# Altium PCB Full_Bridge.PcbDoc
Units mil, origin at the board's own origin, x right, y up, seen from the top; angles counter-clockwise.
Board outline 3300 x 5025 mil, 2 copper layers (Top Layer, Bottom Layer); 35 components, 29 nets, 186 pads, 320 vias.
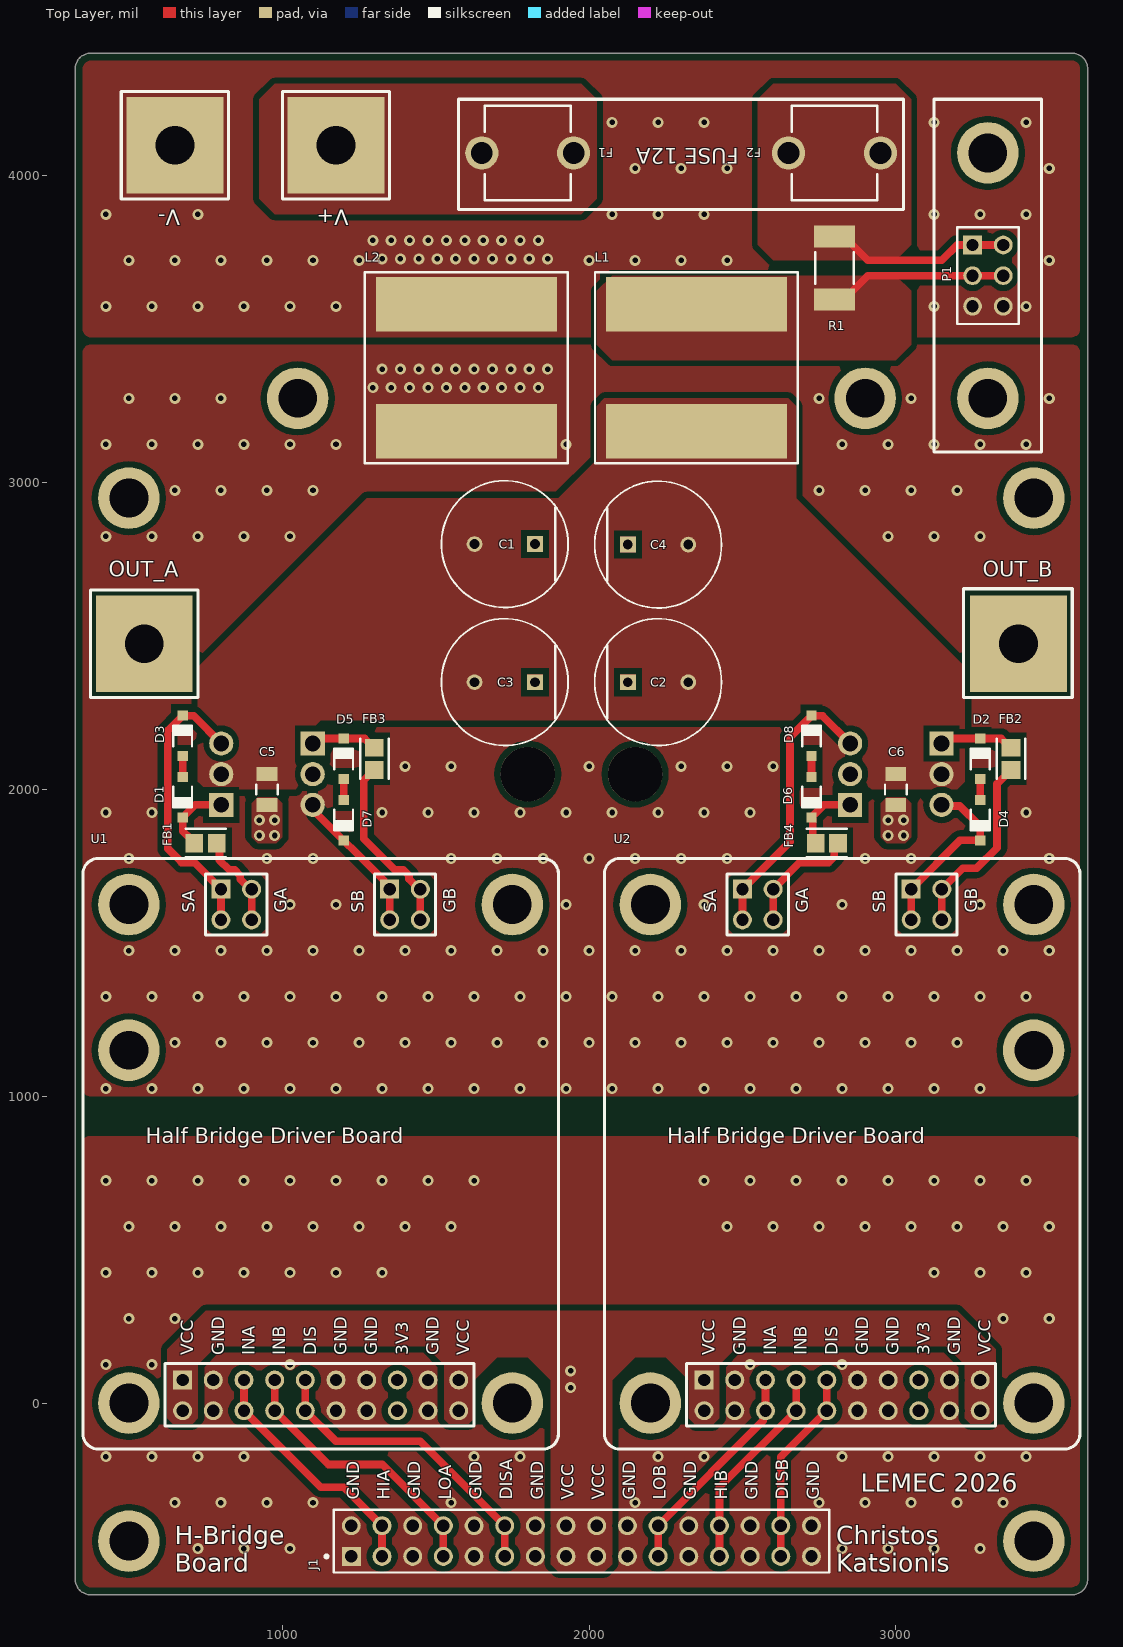
[diagram p0: Top Layer view]
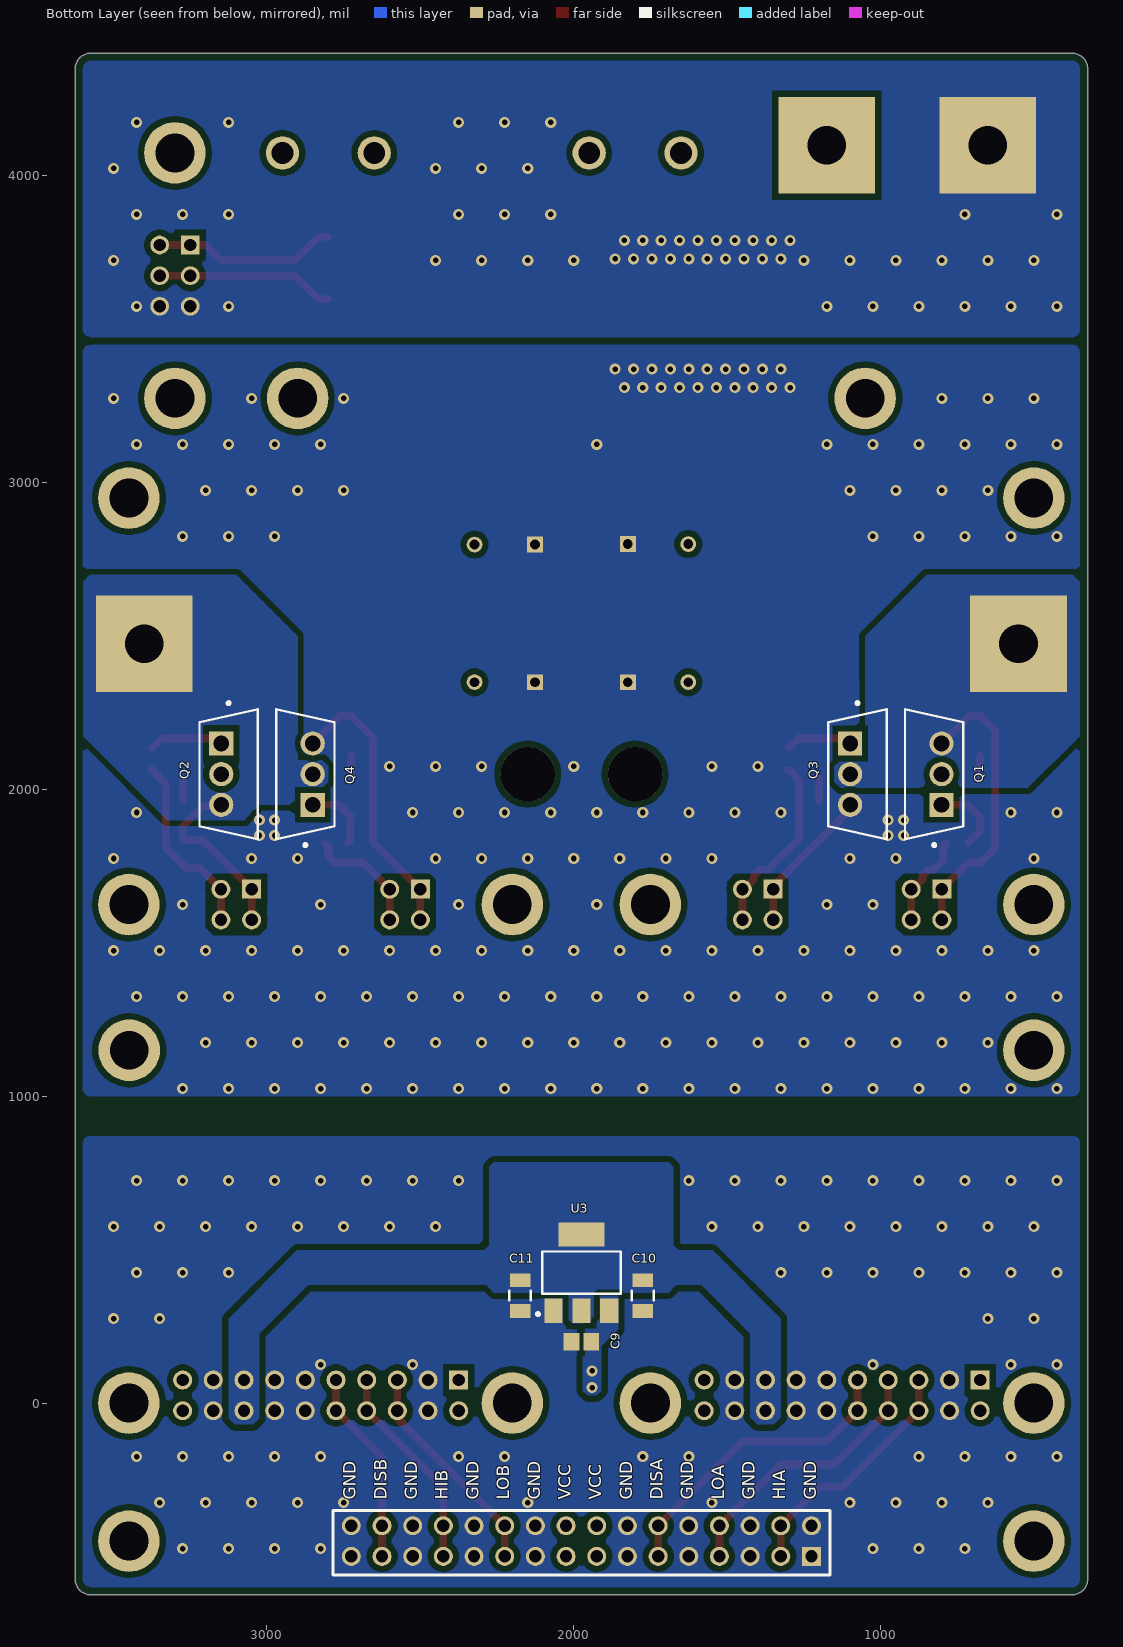
[diagram p1: Bottom Layer view, seen from below]
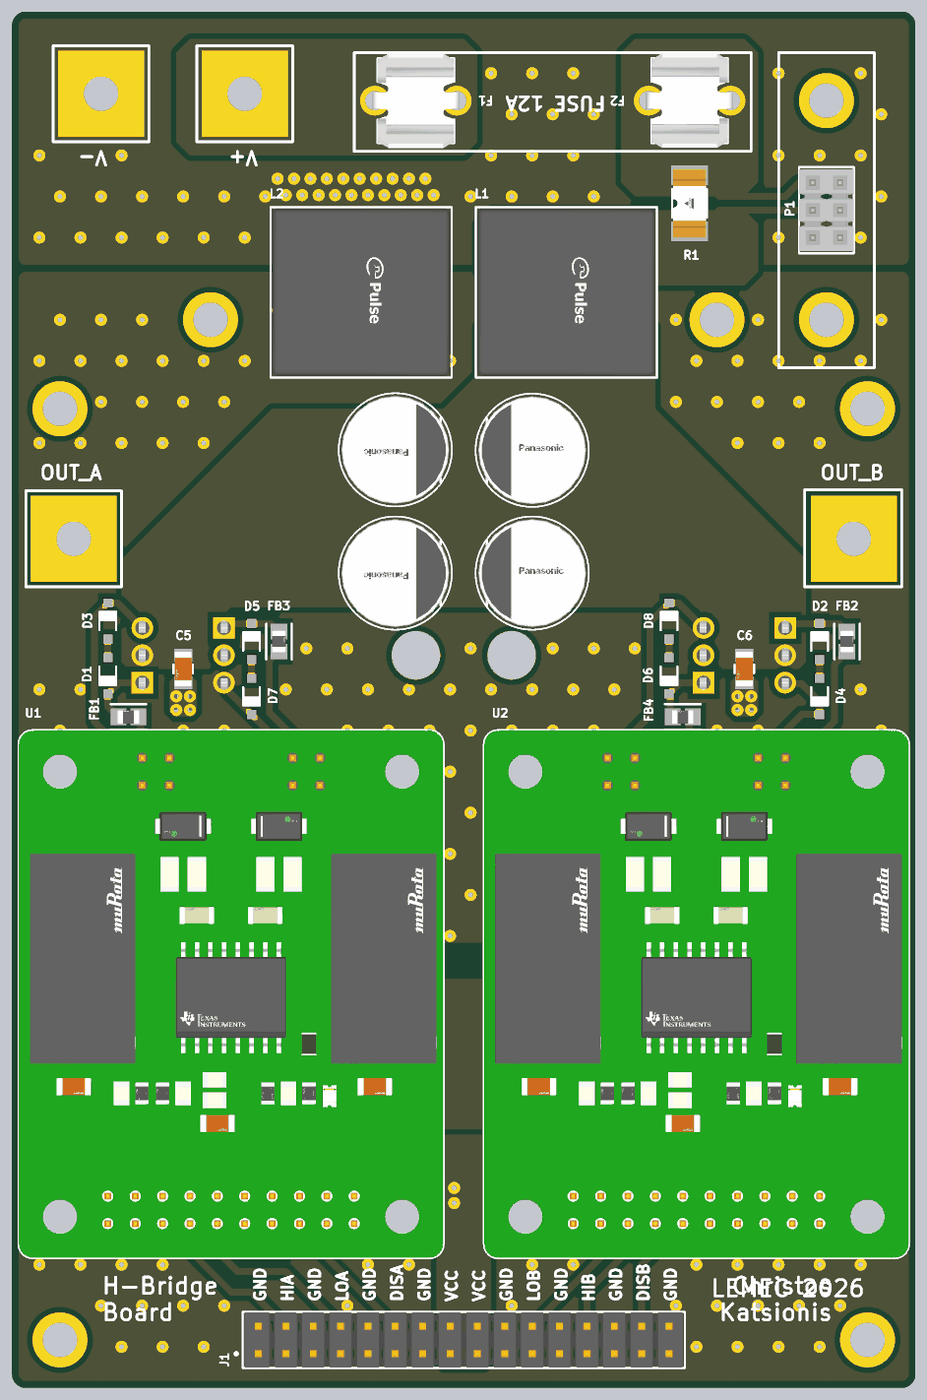
[diagram p2: 3D render of the assembled board from above, using the file's embedded part models]
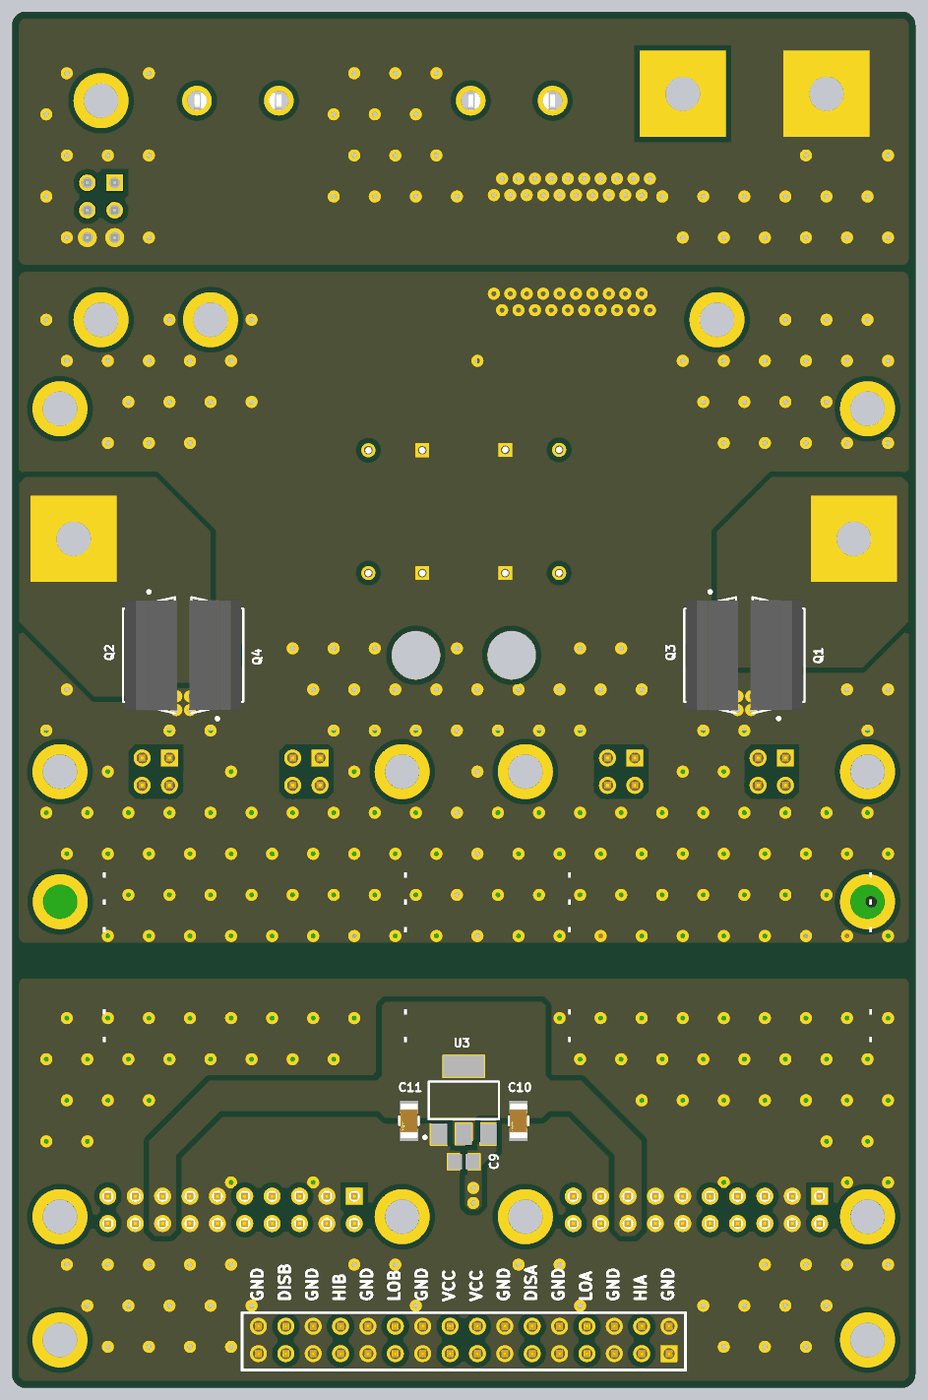
[diagram p3: 3D render of the assembled board from below, using the file's embedded part models]

## Layer stack, top to bottom
Top Solder: solder mask 0.4, Solder Resist, Dk 3.5
Top Layer: signal copper 1.4
Dielectric 1: dielectric 12.6, FR-4, Dk 4.8
Bottom Layer: signal copper 1.4
Bottom Solder: solder mask 0.4, Solder Resist, Dk 3.5

## Board outline
325,-575 325,4350 cw(c375,4350) 375,4400 3575,4400 cw(c3575,4350) 3625,4350 3625,-575 cw(c3575,-575) 3575,-625 375,-625 cw(c375,-575)

## Design rules (kind name [scope] priority, off if disabled: settings)
Clearance [All] p1: gap=19.68 ignorepadtopadclearanceinfootprint=TRUE
Height [All] p1: minheight=0 maxheight=1500 prefheight=500
HoleSize [All] p1: absolutevalues=TRUE maxlimit=200 minlimit=1 maxpercent=80.000 minpercent=20.000
MinimumSolderMaskSliver [All] p1: minsoldermaskwidth=5
PolygonConnect PolygonConnectPowerRails [InNetClass('Power Rails')] p1: connectstyle=Direct reliefconductorwidth=10 reliefentries=4 polygonreliefangle="90 Angle" airgapwidth=10
PolygonConnect PolygonConnectPower [InNetClass('Main Power')] p2: connectstyle=Direct reliefconductorwidth=10 reliefentries=4 polygonreliefangle="90 Angle" airgapwidth=10
PolygonConnect [All] p3: connectstyle=Direct reliefconductorwidth=10 reliefentries=4 polygonreliefangle="90 Angle" airgapwidth=7
RoutingVias [All] p1: holewidth=12 width=24 viastyle="Through Hole" minholewidth=12 minwidth=24 maxholewidth=18 maxwidth=36
SilkToSolderMaskClearance [IsPad] p1: minsilkscreentomaskgap=6 clearancetoexposedcopper=TRUE
SolderMaskExpansion [All] p1: expansion=4 istentingtop=FALSE
SupplyNets "Schematic Supply Nets_1" [InNet('PWR_GND')] p1: voltage=0.000
SupplyNets "Schematic Supply Nets_16" [InNet('+V_BAT')] p2: voltage=0.000
SupplyNets "Schematic Supply Nets_9" [InNet('+3V3')] p3: voltage=0.000
SupplyNets "Schematic Supply Nets_7" [InNet('VCC')] p4: voltage=0.000
SupplyNets "Schematic Supply Nets_5" [InNet('GND')] p5: voltage=0.000
Width PowerRailsWidth [InNetClass('Power Rails')] p1: maxlimit=50 minlimit=20 preferedwidth=30 minimp=50.000000 maximp=50.000000 favimp=50.000000
Width DriverSignalsWidth [InNetClass('Driver Signals')] p2: maxlimit=20 minlimit=15 preferedwidth=20 minimp=50.000000 maximp=50.000000 favimp=50.000000
Width DriverPowerWidth [InNetClass('Driver Power')] p3: maxlimit=50 minlimit=20 preferedwidth=30 minimp=50.000000 maximp=50.000000 favimp=50.000000
Width [All] p4: maxlimit=25 minlimit=15 preferedwidth=20 minimp=50.000000 maximp=50.000000 favimp=50.000000
26 further rules are at their usual default settings.

## Classes and differential pairs
component class Full_Bridge: D1 D2 D3 D4 D5 D6 D7 D8 FB1 FB2 FB3 FB4 Q1 Q2 Q3 Q4 U1 U2
net class "Power Rails": +3V3 GND
component class Aux_Connectors: C1 C2 C3 C4 C5 C6 C9 C10 C11 F1 F2 J1 L1 L2 P1 R1 U3
net class "Main Power": +V_BAT BAT_EXT+ BAT_EXT- HB_OUT_A HB_OUT_B PWR_GND V_SENSE+ V_SENSE-

## Components (designator, comment, footprint, x,y, rotation, side; value= is the part's Value field where it differs from the comment)
C1 "100u" FP-EEHA-G-MFG 1725,2800 r180 top
C2 "100u" FP-EEHA-G-MFG 2225,2350 r0 top
C3 "100u" FP-EEHA-G-MFG 1725,2350 r180 top
C4 "100u" FP-EEHA-G-MFG 2225,2798.43 r0 top
C5 "4.7u" FP-GRM31C-0_2-e0_3_0_8-IPC_C 950,2000 r270 top
C6 "4.7u" FP-GRM31C-0_2-e0_3_0_8-IPC_C 3000,2000 r270 top
C9 "0.1u" CAPC2013X145X48NL20T23 1975,200 r180 bottom
C10 "4.7u" FP-GRM31C-0_2-e0_3_0_8-IPC_C 1775,350 r270 bottom
C11 "4.7u" FP-GRM31C-0_2-e0_3_0_8-IPC_C 2175,350 r270 bottom
D1 "15" VISH-SOD-123-2_V 675,1975 r270 top
D2 "15" VISH-SOD-123-2_V 3275,2100 r90 top
D3 "5" VISH-SOD-123-2_V 675,2175 r90 top
D4 "5" VISH-SOD-123-2_V 3275,1900 r270 top
D5 "15" VISH-SOD-123-2_V 1200,2100 r90 top
D6 "15" VISH-SOD-123-2_V 2725,1975 r270 top
D7 "5" VISH-SOD-123-2_V 1200,1900 r270 top
D8 "5" VISH-SOD-123-2_V 2725,2175 r90 top
F1 "12A" FP-8040_0001-MFG 1800,4075 r180 top
F2 "12A" FP-8040_0001-MFG 2800,4075 r0 top
FB1 "BLM21SN300SH1D" FP-BLM21-0_2-t0_85-e0_5-d-IPC_A 750,1825 r180 top
FB2 "BLM21SN300SH1D" FP-BLM21-0_2-t0_85-e0_5-d-IPC_A 3375,2100 r90 top
FB3 "BLM21SN300SH1D" FP-BLM21-0_2-t0_85-e0_5-d-IPC_A 1300,2100 r90 top
FB4 "BLM21SN300SH1D" FP-BLM21-0_2-t0_85-e0_5-d-IPC_A 2775,1825 r180 top
J1 "MB_CONNECTOR" FP-MTSW-116-22-G-D-315-MFG 1975,-450 r0 top
L1 "22u" FP-PA2247_223NLT-MFG 2350,3375 r270 top
L2 "22u" FP-PA2247_223NLT-MFG 1600,3375 r270 top
P1 "FG_CONNECTOR" SMTC-MTSW-103-07-X-D-244 3250,3775 r270 top
Q1 "IRFB7446PBF" FP-PG-TO220-3-MFG 825,2050 r0 bottom
Q2 "IRFB7446PBF" FP-PG-TO220-3-MFG 3125,2050 r180 bottom
Q3 "IRFB7446PBF" FP-PG-TO220-3-MFG 1075,2050 r180 bottom
Q4 "IRFB7446PBF" FP-PG-TO220-3-MFG 2875,2050 r0 bottom
R1 "1m" FP-WSLF2512-0_43-MFG 2800,3700 r270 top
U1 "HB_Driver_Board" HB_Driver 345,-155 r0 top
U2 "HB_Driver_Board" HB_Driver 2045,-155 r0 top
U3 "NCP1117ST33T3G" ONSC-SOT-223-4-318H-01_A_V 1975,425 r90 bottom

## Footprints (in the part's own frame and the unit in brackets; to place one, negate y for a bottom-side part, rotate by r counter-clockwise, add the part's x,y. Pads: shape width x height; smd on the part's side, far side on the other; paste and mask are expansions set on the pad)
CAPC2013X145X48NL20T23 [mm] "Chip Capacitor, 2-Leads, Body 2.00x1.25mm, IPC Medium Density"
  rect 1.3x1.45 smd: 1(-0.825,0) 2(0.825,0)
  body extent -1.1,-0.72 1.1,0.72, height 1.45
FP-8040_0001-MFG [mm]
  round 2.75 hole 1.8 paste-2539.97 mask+0: 1(-3.8,0) 1(3.8,0)
  silkscreen extent -3.55,-3.93 3.55,3.92, body extent -5.28,-4.03 5.28,4.02, height 0.25
FP-BLM21-0_2-t0_85-e0_5-d-IPC_A [mil]
  rect 57.28x61.27 smd paste+0 mask+0: 1(-36.44,0) 2(36.44,0)
  silkscreen extent -65,-46 65,46, body extent -39,-25 39,25, height 41
FP-EEHA-G-MFG [mm]
  rect 1.3x1.3 hole 0.8 paste-2539.97 mask+0: 1(-2.5,0)
  round 1.3 hole 0.8 paste-2539.97 mask+0: 2(2.5,0)
  silkscreen extent -5.25,-5.25 5.25,5.25, body extent -5.35,-5.35 5.35,5.35, height 0.25
FP-GRM31C-0_2-e0_3_0_8-IPC_C [mil]
  rect 45.46x67.17 smd paste+0 mask+0: 1(-50.23,0) 2(50.23,0)
  silkscreen extent -16,-35 16,35, body extent -63,-31 63,31, height 71
FP-MTSW-116-22-G-D-315-MFG [mm]
  rect 1.57x1.57 hole 1.02 paste-2539.97 mask+0: 1(-19.05,-1.27)
  round 1.57 hole 1.02 paste-2539.97 mask+0: 2(-19.05,1.27) 3(-16.51,-1.27) 4(-16.51,1.27) 5(-13.97,-1.27) 6(-13.97,1.27) 7(-11.43,-1.27) 8(-11.43,1.27) 9(-8.89,-1.27) 10(-8.89,1.27) 11(-6.35,-1.27) 12(-6.35,1.27) 13(-3.81,-1.27) 14(-3.81,1.27) 15(-1.27,-1.27) 16(-1.27,1.27) 17(1.27,-1.27) 18(1.27,1.27) 19(3.81,-1.27) 20(3.81,1.27) 21(6.35,-1.27) 22(6.35,1.27) 23(8.89,-1.27) 24(8.89,1.27) 25(11.43,-1.27) 26(11.43,1.27) 27(13.97,-1.27) 28(13.97,1.27) 29(16.51,-1.27) 30(16.51,1.27) 31(19.05,-1.27) 32(19.05,1.27)
  silkscreen extent -21.23,-2.61 20.51,2.61, body extent -20.61,-2.71 20.61,2.71, height 0.25
FP-PA2247_223NLT-MFG [mm]
  rect 4.5x15 smd paste+0 mask+0: 1(-5.25,0) 2(5.25,0)
  silkscreen extent -7.9,-8.4 7.9,8.4, body extent -8,-8.5 8,8.5, height 0.25
FP-PG-TO220-3-MFG [mm]
  rect 2x2 hole 1.3 paste-2539.97 mask+0: 1(-0.61,2.54)
  round 2 hole 1.3 paste-2539.97 mask+0: 2(-0.61,0) 3(-0.61,-2.54)
  silkscreen extent -2.41,-5.38 2.41,6, body extent -2.22,-5.11 2.61,5.08, height 19.49
FP-WSLF2512-0_43-MFG [mm]
  rect 1.8x3.4 smd paste+0 mask+0: 1(-2.6,0) 2(2.6,0)
  silkscreen extent -1.33,-1.61 1.33,1.61, body extent -3.6,-1.8 3.6,1.8, height 0.25
HB_Driver [mm]
  round 1.57 hole 1.02 paste-2539.97 mask+0: 1(8.382,3.302) 1(31.242,3.302) 1(31.242,5.842) 2(26.162,3.302) 2(26.162,5.842) 3(13.462,3.302) 3(13.462,5.842) 4(16.002,3.302) 4(16.002,5.842) 5(18.542,3.302) 5(18.542,5.842) 6(10.922,3.302) 6(10.922,5.842) 6(21.082,3.302) 6(21.082,5.842) 6(23.622,3.302) 6(23.622,5.842) 6(28.702,3.302) 6(28.702,5.842) 7(14.097,43.942) 7(14.097,46.482) 8(11.557,43.942) 9(28.067,43.942) 9(28.067,46.482) 10(25.527,43.942)
  rect 1.57x1.57 hole 1.02 paste-2539.97 mask+0: 1(8.382,5.842) 8(11.557,46.482) 10(25.527,46.482)
  round 5.099 hole 3.2 paste-2539.97 mask+0: 11(3.937,3.937) 11(3.937,45.212) 11(35.687,3.937) 11(35.687,45.212)
  silkscreen extent 0.13,0.13 39.5,49.02, body extent 0.13,0.13 39.5,49.02, height 16.31
ONSC-SOT-223-4-318H-01_A_V [mm] "SOT223, 4-Leads, Body 6.5x3.5mm, Pitch 2.3mm"
  rect 2x1.5 smd: 1(-3.15,2.3) 2(-3.15,0) 3(-3.15,-2.3)
  rect 2x3.8 smd: 4(3.15,0)
  silkscreen extent -3.55,-3.25 1.75,3.73, body extent -1.75,-3.25 1.75,3.25, height 1.8
SMTC-MTSW-103-07-X-D-244 [mm] "Assembly .025\" [.64] SQ Post Terminal Strip, 2x3 Pins, Vertical, 2.54mm Pitch, Male"
  rect 1.55x1.55 hole 1.02: 1(0,0)
  round 1.55 hole 1.02: 2(0,2.54) 3(2.54,0) 4(2.54,2.54) 5(5.08,0) 6(5.08,2.54)
  silkscreen extent -1.46,-1.27 6.54,3.81, body extent -1.27,-1.27 6.35,3.81, height 8.74
VISH-SOD-123-2_V [mm] "SMD, 2-Leads, Body 2.7x1.55mm, Height 1.35mm"
  rect 0.85x0.85 smd: 1(-1.675,0) 2(1.675,0)
  silkscreen extent -0.85,-0.77 0.85,0.78, body extent -1.35,-0.77 1.35,0.77, height 1.35

## Part data
C1 C2 C3 C4: library part CMP-05428-000952-1, "Conductive Polymer Hybrid Aluminum Electrolytic Capacitors 100uF ±20% 50V RADIAL TH 10x9.5mm"
C5 C6 C10 C11: library part CMP-06035-057352-1, "Chip Multilayer Ceramic Capacitors for General Purpose, 1206, 4.7uF, X7R, 15%, 20%, 50V", Capacitance=4.7uF, Case Code (Imperial)=1206, Case Code (Metric)=3216, Dielectric=X7R, Max Operating Temperature=125°C, Min Operating Temperature=-55°C, Package Quantity=2000, Tolerance=20%, Voltage Rating=50V, Case/Package=1206, Depth=1.6mm, Height=1.6mm, Lead Free="Lead Free", Length=3.2mm, Mount="Surface Mount", Packaging="Tape and Reel", Radiation Hardening=No, Termination=SMD/SMT, Thickness=0.071inch, Voltage Rating (DC)=50V, Width=0.063inch
C9: library part CMP-2007-01705-1, Manufacturer=Vitramon, Part Number=VJ0805Y104KXAMR
D1 D2 D5 D6: library part CMP-0931-00033-1, "Small Signal Zener Diode, 15 V +/- 5%, -55 to 155 degC, 2-Pin SOD-123, RoHS, Tape and Reel", Manufacturer="Vishay Semiconductor", Operating Temperature="-55 to 150 degC", PartNumber=MMSZ5245B-E3-08, Power Dissipation (mW)=500, Test Current (IZT1) (mA)=8.5, Tolerance="+/- 5%", ComponentLink1Description="Manufacturer URL", ComponentLink1URL=http://www.vishay.com/, ComponentLink2Description=Datasheet, ComponentLink2URL=http://www.vishay.com/docs/85774/mmsz5225.pdf, ComponentLink3Description="Package Specification", ComponentLink3URL=http://www.vishay.com/docs/85774/mmsz5225.pdf, DatasheetVersion="Rev. 1.9", Int. Construction=Single, Mounting Technology="Surface Mount", PackageDescription="2-Pin SMD, Body 2.7 x 1.55 mm, Height 1.35 mm", PackageReference=SOD-123-2, PackageVersion="Rev. 1.9", Packing="Tape and Reel", RoHS=TRUE, Zener Impedance (IZT1) (Max.) (Ohm)=16, Zener Voltage (NOM.) (V)=15
D3 D4 D7 D8: library part CMP-0931-00024-1, "Small Signal Zener Diode, 5.1 V +/- 5%, -55 to 155 degC, 2-Pin SOD-123, RoHS, Tape and Reel", Manufacturer="Vishay Semiconductor", Operating Temperature="-55 to 150 degC", PartNumber=MMSZ5231B-E3-08, Power Dissipation (mW)=500, Test Current (IZT1) (mA)=20, Tolerance="+/- 5%", Zener Voltage (NOM.) (V)=5.1, ComponentLink1Description="Manufacturer URL", ComponentLink1URL=http://www.vishay.com/, ComponentLink2Description=Datasheet, ComponentLink2URL=http://www.vishay.com/docs/85774/mmsz5225.pdf, ComponentLink3Description="Package Specification", ComponentLink3URL=http://www.vishay.com/docs/85774/mmsz5225.pdf, DatasheetVersion="Rev. 1.9", Int. Construction=Single, Mounting Technology="Surface Mount", PackageDescription="2-Pin SMD, Body 2.7 x 1.55 mm, Height 1.35 mm", PackageReference=SOD-123-2, PackageVersion="Rev. 1.9", Packing="Tape and Reel", RoHS=TRUE, Zener Impedance (IZT1) (Max.) (Ohm)=17
F1 F2: library part CMP-26292-000011-1, "FUSE CLIP CARTRIDGE 600V 32A PCB", Color=Silver, Current Rating=32A, Max Operating Temperature=125°C, Min Operating Temperature=-55°C, Package Quantity=1000, Voltage=600V, Contact Material=Copper, Contact Plating=Tin, Depth=8.2mm, Fuse Current=32A, Fuse Size="1/4\" Dia x 1-1/4\" L (6.35mm x 31.8mm)", Height=14.3mm, Length=8mm, Material=Copper, Mount=PCB, Number of Circuits=1, Orientation=Horizontal, Packaging=Bulk, Radiation Hardening=No, REACH SVHC="No SVHC", Series=CQP, Termination="PC Pin", Voltage Rating (AC)=600V, Voltage Rating (DC)=600V, Weight=0.070548oz, Width=7.2mm
FB1 FB2 FB3 FB4: library part CMP-06046-001922-1, "Chip Ferrite Bead, 0805, 30Ω @ 100MHz, 0.004Ω, ±10Ω, 8.5A", Case Code (Imperial)=0805, Case Code (Metric)=2012, DC Resistance (DCR)=4mR, Max Current Rating=8.5A, Max Operating Temperature=125°C, Min Operating Temperature=-55°C, Package Quantity=4000, Ratings=AEC-Q200, Case/Package=0805, Height=0.041inch, Length=0.079inch, Mount="Surface Mount", Number of Lines=1, Packaging="Tape and Reel", RoHS Compliant=Yes, Width=0.049inch
J1: library part CMP-02766-000676-1, "CONN HEADER VERT 32POS 2.54MM", Contact Material=Bronze, Contact Plating=Gold, Lead Free="Lead Free", Number of Rows=2
L1 L2: library part CMP-16293-000010-1, "FIXED IND 22UH 16A 15.8MOHM SMD"
P1: library part CMP-1024-00096-1, "Modified .025\" SQ Post Header, Through-hole, Vertical, -55 to 125 degC, 2.54 mm Pitch, 6-Pin, Male, RoHS", Manufacturer=Samtec, PartNumber=MTSW-103-07-G-D-244, Temperature Range="-55 to 125 degC", ComponentLink1Description="Manufacturer URL", ComponentLink1URL=http://www.samtec.com, ComponentLink2Description=Datasheet, ComponentLink2URL=http://www.samtec.com/documents/webfiles/pdf/MTSW.PDF, ComponentLink3Description="Package Specification", ComponentLink3URL=http://www.samtec.com/documents/webfiles/cpdf/MTSW-XXX-XX-X-X-XXXX-XX-XXX-MKT1.pdf, DatasheetVersion=F-214, Mounting Technology=Through-hole, Orientation=Vertical, PackageDescription="Assembly .025\" [.64] SQ Post Terminal Strip", PackageReference=MTSW-103-07-X-D-244, PackageVersion="BI, 2/1987", Pitch="2.54 mm", RoHS=True
Q1 Q2 Q3 Q4: library part CMP-32901-000256-1, "MOSFET N-CH 40V 120A TO220AB", Case/Package=TO-220, Continuous Drain Current (ID)=120A, Drain to Source Voltage (Vdss)=40V, Input Capacitance=4.73nF, Max Operating Temperature=175°C, Max Power Dissipation=143W, Min Operating Temperature=-55°C, Threshold Voltage=3V, Halogen Free="Halogen Free", Lead Free="Lead Free", Max Dual Supply Voltage=40V, Mount="Through Hole", Number of Pins=3, Packaging=Rail/Tube, Rds On Max=2.5mR, REACH SVHC="No SVHC", RoHS Compliant=Yes
R1: library part CMP-02407-013110-1, "RES 0.001 OHM 1% 5W 2512", Case Code (Imperial)=2512, Case Code (Metric)=6432, Max Operating Temperature=170°C, Max Power Dissipation=5W, Min Operating Temperature=-65°C, Ratings=AEC-Q200, Resistance=1mR, Resistor Type="Metal Element", Temperature Coefficient=170ppm/°C, Tolerance=1%, Case/Package=2512, Features="Moisture Resistant", Height=0.024inch, Lead Free="Lead Free", Length=0.25inch, Number of Terminations=2, Packaging="Cut Tape", RoHS Compliant=Yes, Series=WSLF, Width=0.125inch
U3: library part CMP-1679-00010-1, "Low-Dropout Positive Fixed Voltage Regulator, 1 A, 3.3 V Output Voltage, 0 to 125 degC, 4-Pin SOT-223 (318H-01), Pb-Free, Tape and Reel", Case Code (Imperial)=0603, Case Code (Metric)=1608, Max Operating Temperature="155 degC", Min Operating Temperature="-55 degC", Package Quantity=5000, Power Rating="100 mW", Resistance="220 kohm", Tolerance=1%, Type (Resistor)="Thick Film", Voltage Rating="75 V", Case\Package=0603, ComponentLink1Description="Manufacturer URL", ComponentLink1URL=http://www.onsemi.com/, ComponentLink2Description=Datasheet, ComponentLink2URL=http://www.onsemi.com/pub_link/Collateral/NCP1117-D.PDF, DatasheetVersion="Rev. 27, 09/2014", Height="0.45 mm", Length="1.55 mm", Mount="Surface Mount", PackageDescription="4-Pin Small Outline Transistor, Body 6.5 x 3.5 mm, Pitch 2.3 mm", PackageReference=SOT-223-4-318H-01_A, Packaging="Tape and Reel", Radiation Hardening=No, REACH SVHC=Unknown, RoHSCompliant=true, Weight="7.1E-05 oz", Width="0.85 mm"

## Free pads (board coordinates)
  round 200.76 hole 125.98 paste-99999 mask+0: 11(500,-450) 11(500,1150) 11(500,2950) 11(1050,3275) 11(2900,3275) 11(3300,3275) 11(3300,4075) 11(3449.02,1150) 11(3450,-450) 11(3450,2950)
  round 177.17 hole 177.17 paste-99999 mask+0: 15(1800,2050) 15(2150,2050)
  rect 314.96x314.96 hole 125.98 paste-99999 mask+0: 16(550,2475) 16(650,4100) 16(1175,4100) 16(3400,2475)

## Via types
v1: diameter 36, hole 18, Top Layer to Bottom Layer, 320 vias

## Nets (pads, with @x,y where several pads share a name; then routed paths per layer and width w, separated by ;. In a path a pad name is that pad's centre, name@x,y a point inside that pad or via, vN(x,y) a via of type N, cw(c..) or ccw(c..) an arc to the next point about the centre after c; other vN are vias at no path point)
+3V3: C10.1 C11.1 U1.2 U2.2 U3.2 U3.4
+V_BAT: C1.2 C2.2 C3.2 C4.2 C5.1 C6.1 L1.2 Q1.2 Q2.2
BAT_EXT+: F1.1 pad.16@1175,4100
BAT_EXT-: L2.1 P1.5 P1.6 pad.16@650,4100
  other v1: 425,3575 575,3575 725,3575 875,3575 1025,3575 1175,3575 3125,3575 3425,3575 500,3725 650,3725 800,3725 950,3725 1100,3725 1250,3725 2000,3725 2150,3725 2300,3725 2450,3725 3500,3725 1325,3730 1385,3730 1445,3730 1505,3730 1565,3730 1625,3730 1685,3730 1745,3730 1805,3730 1865,3730 1295,3790 1355,3790 1415,3790 1475,3790 1535,3790 1595,3790 1655,3790 1715,3790 1775,3790 1835,3790 425,3875 725,3875 2075,3875 2225,3875 2375,3875 3125,3875 3275,3875 3425,3875 2150,4025 2300,4025 2450,4025 3500,4025 2075,4175 2225,4175 2375,4175 3125,4175 3425,4175
GND: C9.1 C10.2 C11.2 J1.1 J1.2 J1.5 J1.6 J1.9 J1.10 J1.13 J1.14 J1.19 J1.20 J1.23 J1.24 J1.27 J1.28 J1.31 J1.32 U1.6 U2.6 U3.1
  other v1: 725,-475 875,-475 1025,-475 2825,-475 2975,-475 3125,-475 3275,-475 650,-325 800,-325 950,-325 1100,-325 1550,-325 2150,-325 2750,-325 2900,-325 3050,-325 3200,-325 3350,-325 425,-175 575,-175 725,-175 875,-175 1625,-175 1775,-175 2225,-175 2375,-175 2825,-175 2975,-175 3125,-175 3275,-175 3425,-175 425,125 575,125 1025,125 2525,125 2825,125 500,275 650,275 3350,275 3500,275 425,425 575,425 725,425 875,425 1025,425 1175,425 1325,425 3125,425 3275,425 3425,425 500,575 650,575 800,575 950,575 1100,575 1250,575 1400,575 1550,575 2450,575 2600,575 2750,575 2900,575 3050,575 3200,575 3350,575 3500,575 425,725 575,725 725,725 875,725 1025,725 1175,725 1325,725 1475,725 1625,725 2375,725 2525,725 2675,725 2825,725 2975,725 3125,725 3275,725 3425,725
HB_OUT_A: D3.2 pad.16@550,2475 Q1.3 Q3.2 U1.8 | length 946.1
  Top Layer w25: U1.8@800,1575 800,1675 712.82,1762.18 671.59,1762.18 626.08,1807.68 626.08,2192.03 D3.2 675.73,2240.22 710.77,2240.22 Q1.3
HB_OUT_B: D4.2 pad.16@3400,2475 Q2.3 Q4.2 U2.10 | length 591.8
  Top Layer w25: U2.10@3050,1575 3050,1675 3209.06,1834.06 D4.2 3275,1879.96 3208.83,1946.14 3152.88,1946.14 Q2.3
NetD1_1: D1.1 D3.1 | length 68.1
  Top Layer w25: D1.1 D3.1
NetD1_2: D1.2 FB1.2 Q1.1 | length 244.1
  Top Layer w25: FB1.2 713.56,1826.99 691.64,1848.91 689.64,1848.91 675,1863.56 D1.2 715.94,1950 Q1.1
NetD2_1: D2.1 D4.1 | length 68.1
  Top Layer w25: D4.1 D2.1
NetD2_2: D2.2 FB2.2 Q2.1 | length 244.8
  Top Layer w25: Q2.1 3164.96,2165.94 D2.2 3343.5,2165.94 3373.01,2136.44 FB2.2
NetD5_1: D5.1 D7.1 | length 68.1
  Top Layer w25: D7.1 D5.1
NetD5_2: D5.2 FB3.2 Q3.1 | length 219.8
  Top Layer w25: Q3.1 1114.96,2165.94 1268.5,2165.94 1298.01,2136.44 FB3.2
NetD6_1: D6.1 D8.1 | length 68.1
  Top Layer w25: D6.1 D8.1
NetD6_2: D6.2 FB4.2 Q4.1 | length 232.6
  Top Layer w25: FB4.2 2729.23,1834.32 2729.23,1904.82 D6.2 2765.94,1950 Q4.1
NetFB1_1: FB1.1 U1.7 | length 309.4
  Top Layer w25: FB1.1 795,1816.44 795,1770 826.91,1738.09 844.24,1738.09 863.09,1719.24 863.09,1708.05 896.14,1675 900,1675 U1.7@900,1575
NetFB2_1: FB2.1 U2.9 | length 609.2
  Top Layer w25: U2.9@3150,1575 3150,1675 3218.02,1743.02 3262.94,1743.02 3330,1810.07 3330,2018.56 3356.87,2045.42 3356.87,2047.42 3373.01,2063.56 FB2.1
NetFB3_1: FB3.1 U1.9 | length 599.1
  Top Layer w25: FB3.1 1298.01,2063.56 1281.87,2047.42 1281.87,2046.96 1265,2030.09 1265,1840 1366.91,1738.09 1394.24,1738.09 1413.09,1719.24 1413.09,1708.05 1446.14,1675 1450,1675 U1.9@1450,1575
NetFB4_1: FB4.1 U2.7 | length 392.3
  Top Layer w25: U2.7@2600,1575 2600,1675 2687.18,1762.18 2780.53,1762.18 2799.38,1781.03 2799.38,1812.94 FB4.1
NetJ1_3: J1.3 J1.4 U1.3 | length 805.3
  Top Layer w25: U1.3@875,75 875,-25 1125,-275 1200,-275 J1.4 J1.3
NetJ1_7: J1.7 J1.8 U1.4 | length 905.3
  Top Layer w25: U1.4@975,75 975,-25 1150.28,-200.28 1325.28,-200.28 J1.8 J1.7
NetJ1_11: J1.11 J1.12 U1.5 | length 1005.3
  Top Layer w25: U1.5@1075,75 1075,-25 1175,-125 1450,-125 J1.12 J1.11
NetJ1_21: J1.21 J1.22 U2.3 | length 720
  Top Layer w25: J1.21 J1.22 2567.96,-57.04 2567.96,-32.04 2575,-25 U2.3@2575,75
NetJ1_25: J1.25 J1.26 U2.4 | length 678.6
  Top Layer w25: J1.25 J1.26 2425,-275 2675,-25 U2.4@2675,75
NetJ1_29: J1.29 J1.30 U2.5 | length 637.1
  Top Layer w25: J1.29 J1.30 2625,-175 2775,-25 U2.5@2775,75
PWR_GND: C1.1 C2.1 C3.1 C4.1 C5.2 C6.2 D7.2 D8.2 L2.2 Q3.3 Q4.3 U1.10 U2.8 | length 1401.8
  Top Layer w25: Q3.3 1109.3,1939.72 1109.3,1924.76 1331.59,1702.46 1331.59,1693.41 1350,1675 U1.10@1350,1575 ; U2.8@2500,1575 2500,1675 2655,1830 2655,2170.94 D8.2 2725.73,2240.22 2760.77,2240.22 Q4.3
  other v1: 425,1025 575,1025 725,1025 875,1025 1025,1025 1175,1025 1325,1025 1475,1025 1625,1025 1775,1025 1925,1025 2075,1025 2225,1025 2375,1025 2525,1025 2675,1025 2825,1025 2975,1025 3125,1025 3275,1025 650,1175 800,1175 950,1175 1100,1175 1250,1175 1400,1175 1550,1175 1700,1175 1850,1175 2000,1175 2150,1175 2300,1175 2450,1175 2600,1175 2750,1175 2900,1175 3050,1175 3200,1175 425,1325 575,1325 725,1325 875,1325 1025,1325 1175,1325 1325,1325 1475,1325 1625,1325 1775,1325 1925,1325 2075,1325 2225,1325 2375,1325 2525,1325 2675,1325 2825,1325 2975,1325 3125,1325 3275,1325 3425,1325 500,1475 650,1475 800,1475 950,1475 1100,1475 1250,1475 1400,1475 1550,1475 1700,1475 1850,1475 2000,1475 2150,1475 2300,1475 2450,1475 2600,1475 2750,1475 2900,1475 3050,1475 3200,1475 3350,1475 3500,1475 1025,1625 1175,1625 1925,1625 2375,1625 2825,1625 3275,1625 500,1775 950,1775 1100,1775 1550,1775 1700,1775 1850,1775 2000,1775 2150,1775 2300,1775 2450,1775 2900,1775 3050,1775 3500,1775 925,1850 975,1850 2975,1850 3025,1850 925,1900 975,1900 2975,1900 3025,1900 425,1925 575,1925 1325,1925 1475,1925 1625,1925 1775,1925 1925,1925 2075,1925 2225,1925 2375,1925 2525,1925 3425,1925 1400,2075 1550,2075 2000,2075 2300,2075 2450,2075 2600,2075 425,2825 575,2825 725,2825 875,2825 1025,2825 2975,2825 3125,2825 3275,2825 650,2975 800,2975 950,2975 1100,2975 2750,2975 2900,2975 3050,2975 3200,2975 425,3125 575,3125 725,3125 875,3125 1025,3125 1175,3125 1925,3125 2825,3125 2975,3125 3125,3125 3275,3125 3425,3125 500,3275 650,3275 800,3275 2750,3275 3050,3275 3500,3275 1295,3310 1355,3310 1415,3310 1475,3310 1535,3310 1595,3310 1655,3310 1715,3310 1775,3310 1835,3310 1325,3370 1385,3370 1445,3370 1505,3370 1565,3370 1625,3370 1685,3370 1745,3370 1805,3370 1865,3370
V_SENSE+: L1.1 P1.3 P1.4 R1.2 | length 582
  Top Layer w25: R1.2 2831.5,3597.64 2908.86,3675 P1.3 P1.4
V_SENSE-: F2.1 P1.1 P1.2 R1.1 | length 602.8
  Top Layer w25: R1.1 2831.5,3802.36 2908.86,3725 3150,3725 3200,3775 P1.1 P1.2
VCC: C9.2 J1.15 J1.16 J1.17 J1.18 U1.1 U2.1 U3.3
  other v1: 1940,50 1940,105
pads on no net: U1.11 U2.11

## Polygon pours and split planes (outlines as drawn)
HB_OUT_A on Bottom Layer "GND" (solid, pour order 52): 1130,2005 890,2005 520,2005 350.98,2174.02 350.98,2677.98 373.01,2700 850,2700 1050.21,2499.79 1049.79,2095 1130,2095 1150,2075 1150,2025
PWR_GND on Bottom Layer "GND" (solid, pour order 146): 350,3425 350,1025 ccw(c375,1025) 375,1000 3575,1000 ccw(c3575,1025) 3600,1025 3600,3425 ccw(c3575,3425) 3575,3450 375,3450 ccw(c375,3425)
VCC on Bottom Layer "VCC_L02_P099" (solid, pour order 99): 1855,350 1855,240 1910,185 1910,40 1925,25 1955,25 1970,40 1970,245 1945,245 1915,275 1915,350
+3V3 on Bottom Layer "Bottom Layer-+3V3" (solid, pour order 108): 2285,385 2865,385 3025,225 3025,-50 3045,-70 3105,-70 3125,-50 3125,275 2902.5,497.5 2292.5,497.5 2275,515 2275,770 2260,785 1690,785 1675,770 1675,515 1657.5,497.5 1547.5,497.5 1325,275 1325,-46.55 1348.45,-70 1401.55,-70 1425,-46.55 1425,225 1585,385 1665,385 1675,375 1690,360 1920,360 1930,350 1930,275 1945,260 2005,260 2020,275 2020,345 2035,360 2260,360 2275,375
GND on Bottom Layer "GND" (solid, pour order 135): 370,870 3580,870 cw(c3580,850) 3600,850 3600,-575 cw(c3575,-575) 3575,-600 375,-600 cw(c375,-575) 350,-575 350,850 cw(c370,850)
BAT_EXT- on Bottom Layer "BAT_EXT-_L02_P140" (solid, pour order 140): 375,4375 3575,4375 cw(c3575,4350) 3600,4350 3600,3500 cw(c3575,3500) 3575,3475 375,3475 cw(c375,3500) 350,3500 350,4350 cw(c375,4350)
HB_OUT_B on Bottom Layer "GND" (solid, pour order 120): 2800,2025 2820,2005 2895,2005 2900.21,1999.79 2900.21,1974.79 2925,1950 3024.02,1950 3074.02,1900 3325,1900 3599.02,2174.02 3599.02,2677.98 3576.99,2700 3100,2700 2899.79,2499.79 2900.21,2095 2820,2095 2800,2075
+V_BAT on Top Layer "+V_BAT_L01_P114" (solid, pour order 114): 1075,2025 1075,2175 1125,2225 1400,2225 2625,2225 2825.16,2225 2875,2175.17 2875,2025 2900,2000 3200,2000 3225,2025 3225,2400 2675,2950 2675,3250 2650,3275 2050,3275 2025,3250 2025,3075 1900,2950 1275,2950 725,2400 725,2025.98 750.98,2000 1050,2000
PWR_GND on Top Layer "Top Layer-PWR_GND" (solid, pour order 145): 350,1725 350,1025 ccw(c375,1025) 375,1000 3575,1000 ccw(c3575,1025) 3600,1025 3600,1725 3600,3425 ccw(c3575,3425) 3575,3450 375,3450 ccw(c375,3425) 350,3425 350,1725
PWR_GND on Top Layer "PWR_GND_L01_P030" (solid, pour order 30): 920,1975 980,1975 1000,1955 1000,1845 980,1825 920,1825 900,1845 900,1955
PWR_GND on Top Layer "PWR_GND_L01_P112" (solid, pour order 112): 2970,1975 3030,1975 3050,1955 3050,1845 3030,1825 2970,1825 2950,1845 2950,1955
GND on Top Layer "GND" (solid, pour order 144): 370,870 3580,870 cw(c3580,850) 3600,850 3600,-575 cw(c3575,-575) 3575,-600 375,-600 cw(c375,-575) 350,-575 350,850 cw(c370,850)
BAT_EXT+ on Top Layer "BAT_EXT+_L01_P123" (solid, pour order 123): 925,4250 925,3925 975,3875 1975,3875 2025,3925 2025,4250 1975,4300 975,4300
VCC on Top Layer "Top Layer-VCC" (solid, pour order 117): 1527.5,125 1467.5,185 785,185 725,125 725,-50 707.5,-67.5 642.5,-67.5 625,-50 625,175 750,300 3200,300 3325,175 3325,-50 3307.5,-67.5 3242.5,-67.5 3225,-50 3225,125 3165,185 2485,185 2425,125 2425,-50 2405,-70 2345,-70 2325,-50 2325,75 2250,150 2150,150 2075,75 2075,-525 2050,-550 1900,-550 1875,-525 1875,75 1800,150 1700,150 1625,75 1625,-50 1607.5,-67.5 1542.5,-67.5 1527.5,-52.5
V_SENSE- on Top Layer "V_SENSE-_L01_P122" (solid, pour order 122): 2550,4250 2550,3775 2600,3725 3000,3725 3050,3775 3050,4250 3000,4300 2600,4300
V_SENSE+ on Top Layer "V_SENSE+_L01_P119" (solid, pour order 119): 2025,3625 2025,3450 2075,3400 3000,3400 3050,3450 3050,3625 3000,3675 2075,3675
BAT_EXT- on Top Layer "BAT_EXT-_L01_P141" (solid, pour order 141): 375,4375 3575,4375 cw(c3575,4350) 3600,4350 3600,3500 cw(c3575,3500) 3575,3475 375,3475 cw(c375,3500) 350,3500 350,4350 cw(c375,4350)

## Other copper
Top Layer:
  pour cut-out: 770,1725 925,1725 950,1700 950,1550 925,1525 775,1525 750,1550 750,1705
  pour cut-out: 3020,1725 3175,1725 3200,1700 3200,1550 3175,1525 3025,1525 3000,1550 3000,1705
  pour cut-out: 2470,1725 2625,1725 2650,1700 2650,1550 2625,1525 2475,1525 2450,1550 2450,1705
  pour cut-out: 1320,1725 1475,1725 1500,1700 1500,1550 1475,1525 1325,1525 1300,1550 1300,1705
Bottom Layer:
  pour cut-out: 3020,1725 3175,1725 3200,1700 3200,1550 3175,1525 3025,1525 3000,1550 3000,1705
  pour cut-out: 2470,1725 2625,1725 2650,1700 2650,1550 2625,1525 2475,1525 2450,1550 2450,1705
  pour cut-out: 1320,1725 1475,1725 1500,1700 1500,1550 1475,1525 1325,1525 1300,1550 1300,1705
  pour cut-out: 770,1725 925,1725 950,1700 950,1550 925,1525 775,1525 750,1550 750,1705

## Silkscreen, mask and mechanical layers (free items; w line width, h text height)
Top Overlay:
  lines w10: 375,2300 725,2300 725,2650 375,2650 375,2300 ; 475,3925 825,3925 825,4275 475,4275 475,3925 ; 1000,3925 1350,3925 1350,4275 1000,4275 1000,3925 ; 1575,3890 3025,3890 3025,4250 1575,4250 1575,3890 ; 3125,3100 3125,4250 3475,4250 3475,3100 3125,3100 ; 3220.67,2300 3575,2300 3575,2654.33 3220.67,2654.33 3220.67,2300
  text "FUSE 12A" at 2487.44,4090 h50 r180
  text "V-" at 666.65,3890 h50 r180
  text "V+" at 1216.65,3890 h50 r180
  text "OUT_A" at 433.37,2693.33 h50
  text "OUT_B" at 3283.37,2693.33 h50
  text "LEMEC 2026" at 2885.09,-290 h60
  text "GND" at 1250,-315 h40 r90
  text "HIA" at 1350,-315 h40 r90
  text "GND" at 1450,-315 h40 r90
  text "LOA" at 1550,-315 h40 r90
  text "GND" at 1650,-315 h40 r90
  text "DISA" at 1750,-315 h40 r90
  text "GND" at 1850,-315 h40 r90
  text "VCC" at 1950,-315 h40 r90
  text "VCC" at 2050,-315 h40 r90
  text "GND" at 2150,-315 h40 r90
  text "LOB" at 2250,-315 h40 r90
  text "GND" at 2350,-315 h40 r90
  text "HIB" at 2450,-315 h40 r90
  text "GND" at 2550,-315 h40 r90
  text "DISB" at 2650,-315 h40 r90
  text "GND" at 2750,-315 h40 r90
  text "H-Bridge / Board" at 650,-550 h60
  text "Christos / Katsionis" at 2805.16,-550 h60
Bottom Overlay:
  lines w10: 1165,-560 2785,-560 2785,-350 1165,-350 1165,-560
  text "GND" at 1210,-315 h40 r270
  text "HIA" at 1310,-315 h40 r270
  text "GND" at 1410,-315 h40 r270
  text "LOA" at 1510,-315 h40 r270
  text "GND" at 1610,-315 h40 r270
  text "DISA" at 1710,-315 h40 r270
  text "GND" at 1810,-315 h40 r270
  text "VCC" at 1910,-315 h40 r270
  text "VCC" at 2010,-315 h40 r270
  text "GND" at 2110,-315 h40 r270
  text "LOB" at 2210,-315 h40 r270
  text "GND" at 2310,-315 h40 r270
  text "HIB" at 2410,-315 h40 r270
  text "GND" at 2510,-315 h40 r270
  text "DISB" at 2610,-315 h40 r270
  text "GND" at 2710,-315 h40 r270
Mechanical 1:
  the board outline again, w10

## Text inside footprints (layer, text, board x,y; h text height)
U1: Top Overlay "SB" at 1265,1598.35 h40 r90; Top Overlay "Half Bridge Driver Board" at 555,846.66 h50; Top Overlay "SA" at 715,1598.35 h40 r90; Top Overlay "GB" at 1565,1598.35 h40 r90; Top Overlay "GA" at 1015,1598.35 h40 r90; Top Overlay "INB" at 1010,155 h40 r90; Top Overlay "GND" at 810,155 h40 r90; Top Overlay "DIS" at 1110,155 h40 r90; Top Overlay "VCC" at 710,155 h40 r90; Top Overlay "INA" at 910,155 h40 r90; Top Overlay "GND" at 1210,155 h40 r90; Top Overlay "GND" at 1310,155 h40 r90; Top Overlay "VCC" at 1610,155 h40 r90; Top Overlay "3V3" at 1410,155 h40 r90; Top Overlay "GND" at 1510,155 h40 r90
U2: Top Overlay "SB" at 2965,1598.35 h40 r90; Top Overlay "Half Bridge Driver Board" at 2255,846.66 h50; Top Overlay "SA" at 2415,1598.35 h40 r90; Top Overlay "GB" at 3265,1598.35 h40 r90; Top Overlay "GA" at 2715,1598.35 h40 r90; Top Overlay "INB" at 2710,155 h40 r90; Top Overlay "GND" at 2510,155 h40 r90; Top Overlay "DIS" at 2810,155 h40 r90; Top Overlay "VCC" at 2410,155 h40 r90; Top Overlay "INA" at 2610,155 h40 r90; Top Overlay "GND" at 2910,155 h40 r90; Top Overlay "GND" at 3010,155 h40 r90; Top Overlay "VCC" at 3310,155 h40 r90; Top Overlay "3V3" at 3110,155 h40 r90; Top Overlay "GND" at 3210,155 h40 r90